# Altium PCB 388D_Control_v1_PCB1_temp.PcbDoc (part 2 of 4)
Units mil, origin at the board's own origin, x right, y up, seen from the top; angles counter-clockwise.
Board outline 4500 x 3200 mil, 6 copper layers (Top Layer, Singal Layer 2, Signal layer 3, Signal Layer 4, Signal Layer 5, Bottom Layer), stack 63.307 mil thick; 386 components, 377 nets, 1673 pads, 351 vias.
Unrouted connection lines stored in the file: 1151.
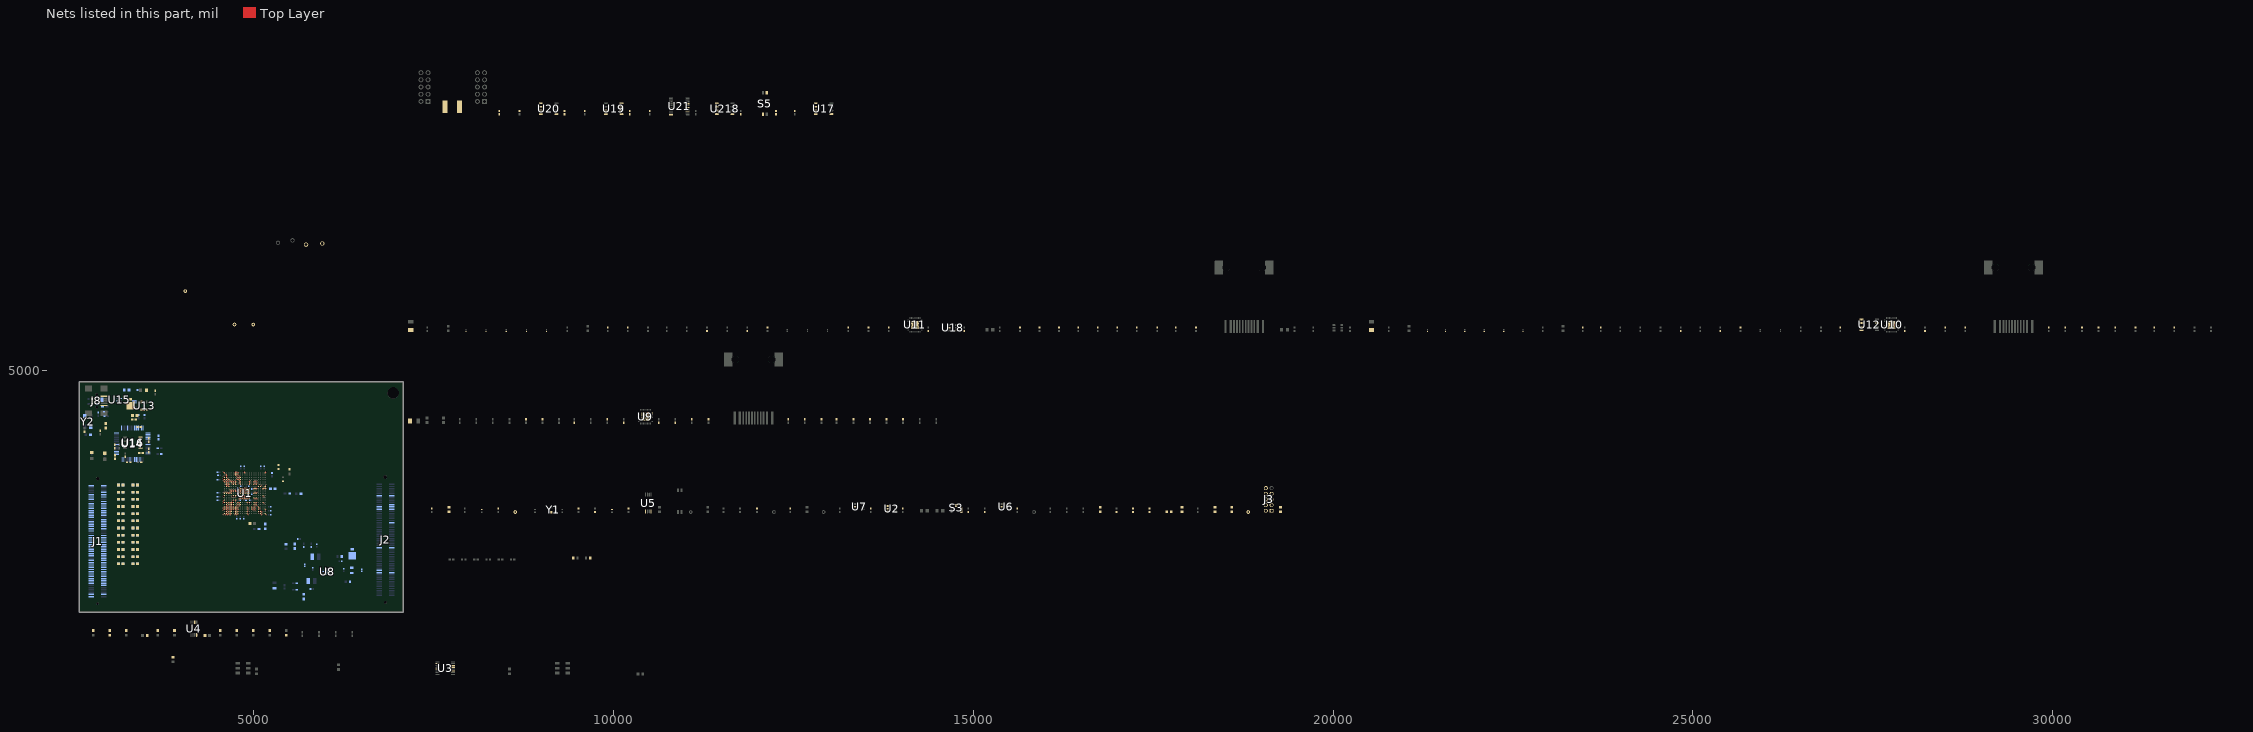
[diagram p2: the nets of this part, all layers, seen from the top]

## Part data
C1 C2 C3 C4 C5 C6 C7 C8 C9 C10 C11 C12 C13 C14 C15 C16 C17 C18 C19 C20 C21 C22 C23 C24: library part CMP-0006920-4, "CAP, CERM, 330 pF, 50 V, +/- 5%, C0G/NP0, 0603", Cap_Case=0603, Manufacturer=Kemet, Supplier Part Number 1=399-1068-1-ND, TempCo=C0G/NP0, Tolerance_%=5%, Value1=Unknown, Value2=50V, ValueDisplayed=330pF, AEC Category=Q200, AEC Qualified=?, Cap_F=330pF, ComponentLink1Description="Datasheet link", ComponentLink1URL=http://www.kemet.com/kemet/web/homepage/kechome.nsf/vapubfiles/F3102_Y5V.pdf/$file/F3102_Y5V.pdf, CompType=Capacitor, LatestRevisionDate=2017-03-09, MountType=SMT, PackageReference=0603, PartNumber=C0603C331J5GACTU, Polarized=N, Published=2008-06-19, Publisher="Texas Instruments", RoHS=Y, SizeArea_mm2=1.28, SizeAreaWB_mm2=4.68, SizeX_mm=1.6, SizeY_mm=0.8, SizeZ_mm=1, Supplier 1=Digi-Key, Supplier 2=Mouser, Supplier 3=Farnell, Supplier Part Number 2=80-C0603C331J5G, Supplier Part Number 3=1414634, TaMax_C=125¡ÆC, TaMin_C=-55¡ÆC, Technology=Ceramic, U/M=EA
C25 C30: library part CMP-0006862-5, "CAP, CERM, 0.1 uF, 10 V, +/- 10%, X7R, 0603", Cap_Case=0603, Manufacturer=Kemet, Supplier Part Number 1=399-1095-1-ND, TempCo=X7R, Tolerance_%=10%, Value1=Unknown, Value2=10V, ValueDisplayed=0.1uF, AEC Category=Q200, AEC Qualified=?, Cap_F=100nF, ComponentLink1Description="Datasheet link", ComponentLink1URL=http://www.kemet.com/kemet/web/homepage/kechome.nsf/vapubfiles/F3102_Y5V.pdf/$file/F3102_Y5V.pdf, CompType=Capacitor, LatestRevisionDate=2017-03-09, MountType=SMT, PackageReference=0603, PartNumber=C0603C104K8RACTU, Polarized=N, Published=2008-06-19, Publisher="Texas Instruments", RoHS=Y, SizeArea_mm2=1.28, SizeAreaWB_mm2=4.68, SizeX_mm=1.6, SizeY_mm=0.8, SizeZ_mm=1, Supplier 1=Digi-Key, Supplier 2=Mouser, Supplier 3=Farnell, Supplier Part Number 2=80-C0603C104K8R, Supplier Part Number 3=1640032, TaMax_C=125¡ÆC, TaMin_C=-55¡ÆC, Technology=Ceramic, U/M=EA
C26 C27 C28 C29 C35 C37: library part CMP-0007324-5, "CAP, CERM, 22 uF, 10 V, +/- 20%, X5R, 0603", Cap_Case=0603, Manufacturer=MuRata, Supplier Part Number 1=490-10476-1-ND, TempCo=X5R, Tolerance_%=20%, Value1=Unknown, Value2=10V, ValueDisplayed=22uF, AEC Category=Q200, AEC Qualified=?, Cap_F=22¥ìF, ComponentLink1Description="Datasheet link", ComponentLink1URL=http://psearch.murata.com/capacitor/product/GRM188R61A226ME15%23.pdf, CompType=Capacitor, LatestRevisionDate=2017-03-09, MountType=SMT, PackageReference=0603, PartNumber=GRM188R61A226ME15D, Polarized=N, Published=2008-06-19, Publisher="Texas Instruments", RoHS=Y, SizeArea_mm2=1.28, SizeAreaWB_mm2=4.68, SizeX_mm=1.6, SizeY_mm=0.8, SizeZ_mm=1, Supplier 1=Digi-Key, Supplier 2=Newark, Supplier 3=Mouser, Supplier Part Number 2=68X2786, Supplier Part Number 3=81-GRM188R61A226ME5D, TaMax_C=85¡ÆC, TaMin_C=-55¡ÆC, Technology=Ceramic, U/M=EA
C31: library part CMP-0006907-5, "CAP, CERM, 2.2 uF, 6.3 V, +/- 10%, X5R, 0603", Cap_Case=0603, Manufacturer=Kemet, Supplier Part Number 1=399-3362-1-ND, TempCo=X5R, Tolerance_%=10%, Value1=Unknown, Value2=6.3V, ValueDisplayed=2.2uF, AEC Category=Q200, AEC Qualified=?, Cap_F=2.2¥ìF, ComponentLink1Description="Datasheet link", ComponentLink1URL=http://www.kemet.com/kemet/web/homepage/kechome.nsf/vapubfiles/F3102_Y5V.pdf/$file/F3102_Y5V.pdf, CompType=Capacitor, LatestRevisionDate=2017-03-09, MountType=SMT, PackageReference=0603, PartNumber=C0603C225K9PACTU, Polarized=N, Published=2008-06-19, Publisher="Texas Instruments", RoHS=Y, SizeArea_mm2=1.28, SizeAreaWB_mm2=4.68, SizeX_mm=1.6, SizeY_mm=0.8, SizeZ_mm=1, Supplier 1=Digi-Key, Supplier 2=Mouser, Supplier 3=Farnell, Supplier Part Number 2=80-C0603C225K9P, Supplier Part Number 3=1288257, TaMax_C=85¡ÆC, TaMin_C=-55¡ÆC, Technology=Ceramic, U/M=EA
C32 C33 C34: library part CMP-0006871-4, "CAP, CERM, 1 uF, 6.3 V, +80/-20%, Y5V, 0603", Cap_Case=0603, Manufacturer=Kemet, Supplier Part Number 1=399-3217-1-ND, TempCo=Y5V, Tolerance_%=80%, Value1=Unknown, Value2=6.3V, ValueDisplayed=1uF, AEC Category=Q200, AEC Qualified=?, Cap_F=1¥ìF, ComponentLink1Description="Datasheet link", ComponentLink1URL=http://www.kemet.com/kemet/web/homepage/kechome.nsf/vapubfiles/F3102_Y5V.pdf/$file/F3102_Y5V.pdf, CompType=Capacitor, LatestRevisionDate=2017-03-09, MountType=SMT, PackageReference=0603, PartNumber=C0603C105Z9VACTU, Polarized=N, Published=2008-06-19, Publisher="Texas Instruments", RoHS=Y, SizeArea_mm2=1.28, SizeAreaWB_mm2=4.68, SizeX_mm=1.6, SizeY_mm=0.8, SizeZ_mm=1, Supplier 1=Digi-Key, Supplier 2=Mouser, Supplier 3=Farnell, Supplier Part Number 2=80-C0603C105Z9V, Supplier Part Number 3=1515067, TaMax_C=85¡ÆC, TaMin_C=-30¡ÆC, Technology=Ceramic, U/M=EA
C36: library part CMP-0006213-2, "CAP, CERM, 33 pF, 25 V, +/- 5%, C0G/NP0, 0402", Cap_Case=0402, Manufacturer="Wurth Elektronik", Supplier Part Number 1=710-885012005043, TempCo=C0G/NP0, Tolerance_%=5%, Value1=Unknown, Value2=25V, ValueDisplayed=33pF, AEC Category=Q200, AEC Grade=N/A, AEC Qualified=N, Cap_F=33pF, ComponentLink1Description="Datasheet link", ComponentLink1URL=http://katalog.we-online.de/pbs/datasheet/885012005043.pdf, CompType=Capacitor, LatestRevisionDate=2017-03-09, MountType=SMT, PackageReference=0402, PartNumber=885012005043, Polarized=N, Published=2008-06-19, Publisher="Texas Instruments", RoHS=Y, SizeArea_mm2=0.5, SizeAreaWB_mm2=3, SizeX_mm=1, SizeY_mm=0.5, SizeZ_mm=0.6, Supplier 1=Mouser, TaMax_C=125¡ÆC, TaMin_C=-55¡ÆC, Technology=Ceramic, U/M=EA, VDC_V=25V
C38 C40 C41 C44 C45 C46 C47 C48 C49 C50 C51 C52 C55 C56 C57 C58 C59 C60 C61 C62 C63 C64 C65 C66 C67 C68 C69 C70: library part CMP-001-00001-6, "Chip Capacitor, 0.1 uF, +/- 5%, 16 V, 0402 (1005 Metric)", Capacitor Type=Ceramic, Case/Package=0402, Max Operating Temperature=125¡ÆC, Min Operating Temperature=-55¡ÆC, Tolerance=5%, Voltage Rating=16V, Mounting Technology=SM, Pins=2, RoHS Compliant=True
C39: library part CMP-001-00081-4, "Chip Capacitor, 22¥ìF +/-40%, 16V, 0805, Thickness 1.45 mm", Case/Package=0805, Max Operating Temperature=85¡ÆC, Min Operating Temperature=-55¡ÆC, Tolerance=5%, Voltage Rating=16V, Mounting Technology=SMT, Pins=2
C42 C43 C53 C54: library part CMP-0006906-5, "CAP, CERM, 2.2 uF, 10 V, +/- 10%, X5R, 0603", Cap_Case=0603, Manufacturer=Kemet, Supplier Part Number 1=399-4911-1-ND, TempCo=X5R, Tolerance_%=10%, Value1=Unknown, Value2=10V, ValueDisplayed=2.2uF, AEC Category=Q200, AEC Qualified=?, Cap_F=2.2¥ìF, ComponentLink1Description="Datasheet link", ComponentLink1URL=http://www.kemet.com/kemet/web/homepage/kechome.nsf/vapubfiles/F3102_Y5V.pdf/$file/F3102_Y5V.pdf, CompType=Capacitor, LatestRevisionDate=2017-03-09, MountType=SMT, PackageReference=0603, PartNumber=C0603C225K8PACTU, Polarized=N, Published=2008-06-19, Publisher="Texas Instruments", RoHS=Y, SizeArea_mm2=1.28, SizeAreaWB_mm2=4.68, SizeX_mm=1.6, SizeY_mm=0.8, SizeZ_mm=1, Supplier 1=Digi-Key, Supplier 2=Mouser, Supplier 3=Farnell, Supplier Part Number 2=80-C0603C225K8P, Supplier Part Number 3=1108322, TaMax_C=85¡ÆC, TaMin_C=-55¡ÆC, Technology=Ceramic, U/M=EA
C71 C72: library part CMP-001-00075-4, "Chip Capacitor, 10¥ìF +/-20%, 10V, 0603, Thickness 1 mm", Case/Package=0603, Max Operating Temperature=85¡ÆC, Min Operating Temperature=-55¡ÆC, Tolerance=10%, Voltage Rating=10V, Mounting Technology=SMT, Pins=2
C73 C75 C77 C78 C108 C126 C132 C137 C138 C139 C140 C141 C142 C143 C145 C147 C151 C152 C153 C154 C155 C156 C157 C158 C159: library part CMP-0006343-2, "CAP, CERM, 0.1 uF, 10 V, +/- 10%, X7R, 0402", Cap_Case=0402, Manufacturer="Samsung Electro-Mechanics", TempCo=X7R, Tolerance_%=10%, Value1=Unknown, Value2=10V, ValueDisplayed=0.1uF, AEC Category=Q200, AEC Grade=N/A, AEC Qualified=N, Cap_F=100nF, ComponentLink1Description="Datasheet link", ComponentLink1URL=http://www.samsungsem.com/kr/front/downloadcms.do?path=/kr/support/product-search/mlcc/__icsFiles/afieldfile/2014/11/05&fileName=S_CL05B104KP5NNNC.pdf, CompType=Capacitor, LatestRevisionDate=2017-03-09, MountType=SMT, PackageReference=0402, PartNumber=CL05B104KP5NNNC, Polarized=N, Published=2008-06-19, Publisher="Texas Instruments", RoHS=Y, SizeArea_mm2=0.5, SizeAreaWB_mm2=3, SizeX_mm=1, SizeY_mm=0.5, SizeZ_mm=0.6, TaMax_C=125¡ÆC, TaMin_C=-55¡ÆC, Technology=Ceramic, U/M=EA, VDC_V=10V
C74 C76: library part CMP-0006236-2, "CAP, CERM, 0.01 uF, 50 V, +/- 5%, X7R, 0402", Cap_Case=0402, Manufacturer=Kemet, Supplier Part Number 1=399-7758-1-ND, TempCo=X7R, Tolerance_%=5%, Value1=Unknown, Value2=50V, ValueDisplayed=0.01uF, AEC Category=Q200, AEC Qualified=?, Cap_F=10nF, ComponentLink1Description="Datasheet link", ComponentLink1URL=http://www.kemet.com/Lists/ProductCatalog/Attachments/53/KEM_C1002_X7R_SMD.pdf, CompType=Capacitor, LatestRevisionDate=2017-03-09, MountType=SMT, PackageReference=0402, PartNumber=C0402C103J5RACTU, Polarized=N, Published=2008-06-19, Publisher="Texas Instruments", RoHS=Y, SizeArea_mm2=0.5, SizeAreaWB_mm2=3, SizeX_mm=1, SizeY_mm=0.5, SizeZ_mm=0.6, Supplier 1=Digi-Key, Supplier 2=Newark, Supplier 3=Mouser, Supplier Part Number 2=57J0044, Supplier Part Number 3=80-C0402C103J5R, TaMax_C=125¡ÆC, TaMin_C=-55¡ÆC, Technology=Ceramic, U/M=EA
C79 C86 C96 C103 C114 C121: library part CMP-0006340-2, "CAP, CERM, 10 uF, 6.3 V, +/- 20%, X5R, 0402", Cap_Case=0402, Manufacturer="Samsung Electro-Mechanics", TempCo=X5R, Tolerance_%=20%, Value1=Unknown, Value2=6.3V, ValueDisplayed=10uF, AEC Category=Q200, AEC Qualified=?, Cap_F=10¥ìF, ComponentLink1Description="Datasheet link", ComponentLink1URL=http://www.samsungsem.com/servlet/DownloadServlet?dir=partnumber&num=&fileName=CL05A106MQ5NUNC.pdf, CompType=Capacitor, LatestRevisionDate=2017-03-09, MountType=SMT, PackageReference=0402, PartNumber=CL05A106MQ5NUNC, Polarized=N, Published=2008-06-19, Publisher="Texas Instruments", RoHS=Y, SizeArea_mm2=0.5, SizeAreaWB_mm2=3, SizeX_mm=1, SizeY_mm=0.5, SizeZ_mm=0.6, TaMax_C=85¡ÆC, TaMin_C=-55¡ÆC, Technology=Ceramic, U/M=EA
C80 C85 C88 C89 C91 C94 C97 C102 C105 C106 C109 C112 C115 C120 C123 C124 C127 C130: library part CMP-0006347-2, "CAP, CERM, 1 uF, 16 V, +/- 10%, X5R, 0402", Cap_Case=0402, Manufacturer="Taiyo Yuden", Supplier Part Number 1=587-3709-2-ND, TempCo=X5R, Tolerance_%=10%, Value1=Unknown, Value2=16V, ValueDisplayed=1uF, AEC Category=Q200, AEC Qualified=?, Cap_F=1¥ìF, ComponentLink1Description="Datasheet link", ComponentLink1URL=http://www.yuden.co.jp/ut/product/category/capacitor/EMK105BJ105KVHF_SS.pdf, CompType=Capacitor, LatestRevisionDate=2017-03-09, MountType=SMT, PackageReference=0402, PartNumber=EMK105BJ105KVHF, Polarized=N, Published=2008-06-19, Publisher="Texas Instruments", RoHS=Y, SizeArea_mm2=0.5, SizeAreaWB_mm2=3, SizeX_mm=1, SizeY_mm=0.5, SizeZ_mm=0.6, Supplier 1=Digi-Key, Supplier 2=Newark, Supplier Part Number 2=68X1293, TaMax_C=85¡ÆC, TaMin_C=-55¡ÆC, Technology=Ceramic, U/M=EA
C81 C84 C87 C90 C92 C93 C98 C101 C104 C107 C110 C111 C116 C119 C122 C125 C128 C129: library part CMP-0064930-2, "CAP, CERM, 0.1 uF, 10 V,+/- 10%, X5R, 0402", Cap_Case=0402, Manufacturer="Taiyo Yuden", Supplier Part Number 1=587-1227-1-ND, TempCo=X5R, Tolerance_%=10%, Value1=Unknown, Value2=10V, ValueDisplayed=0.1uF, AEC Category=Q200, AEC Grade=N/A, AEC Qualified=N, Cap_F=100nF, ComponentLink1Description="Datasheet link", ComponentLink1URL=http://ds.yuden.co.jp/TYCOMPAS/ut/detail.do?productNo=LMK105BJ104KV-F&fileName=LMK105BJ104KV-F_SS&mode=specSheetDownload, CompType=Capacitor, LatestRevisionDate=2017-06-05, MountType=SMT, PackageReference=0402, PartNumber=LMK105BJ104KV-F, Polarized=N, Published=2008-06-19, Publisher="Texas Instruments", RoHS=Y, SizeArea_mm2=0.5, SizeAreaWB_mm2=3, SizeX_mm=1, SizeY_mm=0.5, SizeZ_mm=0.6, Supplier 1=Digi-Key, Supplier 2=Newark, Supplier 3=Mouser, Supplier Part Number 2=86H5618, Supplier Part Number 3=963-LMK105BJ104KV-F, TaMax_C=85¡ÆC, TaMin_C=-55¡ÆC, Technology=Ceramic, U/M=EA, VDC_V=10V
C82 C83 C99 C100 C117 C118: library part CMP-0006227-2, "CAP, CERM, 0.01 uF, 16 V, +/- 10%, X7R, 0402", Cap_Case=0402, Manufacturer="Wurth Elektronik", Supplier Part Number 1=710-885012205031, TempCo=X7R, Tolerance_%=10%, Value1=Unknown, Value2=16V, ValueDisplayed=0.01uF, AEC Category=Q200, AEC Grade=N/A, AEC Qualified=N, Cap_F=10nF, ComponentLink1Description="Datasheet link", ComponentLink1URL=http://katalog.we-online.de/pbs/datasheet/885012205031.pdf, CompType=Capacitor, LatestRevisionDate=2017-03-09, MountType=SMT, PackageReference=0402, PartNumber=885012205031, Polarized=N, Published=2008-06-19, Publisher="Texas Instruments", RoHS=Y, SizeArea_mm2=0.5, SizeAreaWB_mm2=3, SizeX_mm=1, SizeY_mm=0.5, SizeZ_mm=0.6, Supplier 1=Mouser, TaMax_C=125¡ÆC, TaMin_C=-55¡ÆC, Technology=Ceramic, U/M=EA
C95 C113 C131: library part CMP-0008501-2, "CAP, CERM, 4700 pF, 100 V, +/- 10%, X7R, 1206", Cap_Case=1206, Manufacturer=AVX, Supplier Part Number 1=478-1521-1-ND, TempCo=X7R, Tolerance_%=10%, Value1="0.178 ohm", Value2=100V, ValueDisplayed=4700pF, AEC Category=Q200, AEC Grade=N/A, AEC Qualified=N, Cap_F=4.7nF, ComponentLink1Description="Datasheet link", ComponentLink1URL=http://datasheets.avx.com/X7RDielectric.pdf, CompType=Capacitor, ESR_ohm=1.78d, LatestRevisionDate=2017-03-09, MountType=SMT, PackageReference=1206, PartNumber=12061C472KAT2A, Polarized=N, Published=2008-06-19, Publisher="Texas Instruments", RoHS=Y, SizeArea_mm2=5.12, SizeAreaWB_mm2=10.92, SizeX_mm=3.2, SizeY_mm=1.6, SizeZ_mm=1.35, Supplier 1=Digi-Key, Supplier 2=Newark, Supplier 3=Mouser, Supplier Part Number 2=96M1479, Supplier Part Number 3=581-12061C472K, TaMax_C=125¡ÆC, TaMin_C=-55¡ÆC, Technology=Ceramic, U/M=EA
C133 C134 C136 C144 C146: library part CMP-0006950-5, "CAP, CERM, 4.7 uF, 6.3 V, +/- 10%, X5R, 0603", Cap_Case=0603, Manufacturer=Kemet, Supplier Part Number 1=399-3482-1-ND, TempCo=X5R, Tolerance_%=10%, Value1="0.006 ohm", Value2=6.3V, ValueDisplayed=4.7uF, AEC Category=Q200, AEC Qualified=?, Cap_F=4.7¥ìF, ComponentLink1Description="Datasheet link", ComponentLink1URL=http://www.kemet.com/kemet/web/homepage/kechome.nsf/vapubfiles/F3102_Y5V.pdf/$file/F3102_Y5V.pdf, CompType=Capacitor, ESR_ohm=6m, IRMS_A=7.24A, LatestRevisionDate=2017-03-09, MountType=SMT, PackageReference=0603, PartNumber=C0603C475K9PACTU, Polarized=N, Published=2008-06-19, Publisher="Texas Instruments", RoHS=Y, SizeArea_mm2=1.28, SizeAreaWB_mm2=4.68, SizeX_mm=1.6, SizeY_mm=0.8, SizeZ_mm=1, Supplier 1=Digi-Key, Supplier 2=Mouser, Supplier 3=Farnell, Supplier Part Number 2=80-C0603C475K9P, Supplier Part Number 3=9227784, TaMax_C=85¡ÆC, TaMin_C=-55¡ÆC, Technology=Ceramic, U/M=EA
C135: library part CMP-0006203-2, "CAP, CERM, 0.01 uF, 10 V, +/- 10%, X7R, 0402", Cap_Case=0402, Manufacturer=AVX, Supplier Part Number 1=478-7890-1-ND, TempCo=X7R, Tolerance_%=10%, Value1=Unknown, Value2=10V, ValueDisplayed=0.01uF, AEC Category=Q200, AEC Grade=N/A, AEC Qualified=N, Cap_F=10nF, ComponentLink1Description="Datasheet link", ComponentLink1URL=http://datasheets.avx.com/X7RDielectric.pdf, CompType=Capacitor, LatestRevisionDate=2017-03-09, MountType=SMT, PackageReference=0402, PartNumber=0402ZC103KAT2A, Polarized=N, Published=2008-06-19, Publisher="Texas Instruments", RoHS=Y, SizeArea_mm2=0.5, SizeAreaWB_mm2=3, SizeX_mm=1, SizeY_mm=0.5, SizeZ_mm=0.6, Supplier 1=Digi-Key, Supplier 2=Newark, Supplier 3=Mouser, Supplier Part Number 2=94W2829, Supplier Part Number 3=581-0402ZC103KAT2A, TaMax_C=125¡ÆC, TaMin_C=-55¡ÆC, Technology=Ceramic, U/M=EA
C148: library part CMP-0006319-2, "CAP, CERM, 3300 pF, 50 V, +/- 10%, X7R, AEC-Q200 Grade 1, 0402", Cap_Case=0402, Manufacturer=TDK, Supplier Part Number 1=445-6891-1-ND, TempCo=X7R, Tolerance_%=10%, Value1="0.785178 ohm", Value2=50V, ValueDisplayed=3300pF, AEC Category=Q200, AEC Grade=1, AEC Qualified=Y, Cap_F=3.3nF, ComponentLink1Description="Datasheet link", ComponentLink1URL=https://product.tdk.com/en/search/capacitor/ceramic/mlcc/info?part_no=CGA2B2X7R1H332K050BA, CompType=Capacitor, ESR_ohm=7.85178d, IRMS_A=2.72902dA, LatestRevisionDate=2017-03-09, MountType=SMT, PackageReference=0402, PartNumber=CGA2B2X7R1H332K050BA, Polarized=N, Published=2008-06-19, Publisher="Texas Instruments", RoHS=Y, SizeArea_mm2=0.5, SizeAreaWB_mm2=3, SizeX_mm=1, SizeY_mm=0.5, SizeZ_mm=0.6, Supplier 1=Digi-Key, Supplier 2=Mouser, Supplier Part Number 2=810-CGA2B2X7R1H332K050BA, TaMax_C=125¡ÆC, TaMin_C=-55¡ÆC, Technology=Ceramic, U/M=EA
C149 C150: library part CMP-0750098-1, "CAP, CERM, 27 pF, 50 V,+/- 5%, C0G/NP0, 0402", Cap_Case=0402, Manufacturer=Kemet, TempCo=C0G/NP0, Tolerance_%=5%, Value2=50V, ValueDisplayed=27pF, AEC Category=Q200, AEC Grade=N/A, AEC Qualified=N, Cap_F=27pF, ComponentLink1Description="Datasheet link", ComponentLink1URL=https://content.kemet.com/datasheets/KEM_C1003_C0G_SMD.pdf, CompType=Capacitor, Green_EU RoHS=Passed, Green_EU RoHS-2=Passed, Green_Lifecycle=Active, Green_REACh=Passed, MountType=SMT, PackageReference=0402, PartNumber=C0402C270J5GACTU, Polarized=N, RoHS=Y, SizeArea_mm2=0.5, SizeAreaWB_mm2=3, SizeX_mm=1, SizeY_mm=0.5, SizeZ_mm=0.6, TaMax_C=125¡ÆC, TaMin_C=-55¡ÆC, Technology=Ceramic, U/M=EA
C160: library part CMP-0082066-1, "CAP, CERM, 10 pF, 3000 V,+/- 5%, C0G/NP0, AEC-Q200 Grade 1, 1812", Cap_Case=1812, Manufacturer=Kemet, Supplier Part Number 1=399-7113-1-ND, TempCo=C0G/NP0, Tolerance_%=5%, Value2=3000V, ValueDisplayed=10pF, AEC Category=Q200, AEC Grade=1, AEC Qualified=Y, Cap_F=10pF, ComponentLink1Description="Datasheet link", ComponentLink1URL=https://search.kemet.com/component-edge/download/datasheet/C1812C100JHGACTU.pdf, CompType=Capacitor, MountType=SMT, PackageReference=1812, PartNumber=C1812C100JHGACTU, Polarized=N, RoHS=Y, SizeArea_mm2=14.4, SizeAreaWB_mm2=23.1, SizeX_mm=4.5, SizeY_mm=3.2, SizeZ_mm=1.8, Supplier 1=Digi-Key, Supplier 2=Mouser, Supplier Part Number 2=80-C1812C100JHG, TaMax_C=125¡ÆC, TaMin_C=-55¡ÆC, Technology=Ceramic, U/M=EA
D1: "Diode, Schottky, 10 V, 1 A, AEC-Q101, POWERMITE", Case/Package=POWERMITE, Manufacturer="ON Semiconductor", PartNumber=MBRM110ET1G, Value1=1A, Value2=0.53V, AEC Category=Q101, AEC Qualified=Y, Available Preview Images=2D, ComponentLink1Description="Datasheet link", ComponentLink1URL=http://www.onsemi.com/pub_link/Collateral/MBRM110E-D.PDF, CompType=Diode, Design Item ID=CMP-0028747-2, Green_EU RoHS=Incomplete, Green_EU RoHS-2=Incomplete, Green_Lifecycle="Not Set", Green_REACh=Incomplete, Io_A=1A, MountType=SMT, RoHS=Y, SizeArea_mm2=7.995, SizeAreaWB_mm2=14.945, SizeX_mm=3.9, SizeY_mm=2.05, SizeZ_mm=1.15, Source=MCU063B.SCHLIB, TJmax_C=150¡ÆC, Type=Schottky, Vf_V=530mV, Vr_V=10V
D2: library part CMP-004-00069-1, "SURFACE MOUNT SILICON LOW VF SCHOTTKY DIODE 0.5 AMP", Arrow Part Number="CFSH05-20L TR PBFREE", Manufacturer_Name="Central Semiconductor", Mouser Part Number=610-CFSH05-20LTR, Arrow Price/Stock=https://www.arrow.com/en/products/cfsh05-20ltrpbfree/central-semiconductor?region=nac, Datasheet Link=https://my.centralsemi.com/get_document.php?cmp=1&mergetype=pd&mergepath=pd&pdf_id=CFSH05-20L.PDF, Design Item ID=CFSH05-20L_TR_PBFREE, Height=0.4mm, Manufacturer_Part_Number="CFSH05-20L TR PBFREE", Mouser Price/Stock=https://www.mouser.co.uk/ProductDetail/Central-Semiconductor/CFSH05-20L-TR-PBFREE?qs=u16ybLDytRbLc8US0gUlgw%3D%3D, Source=SamacSys.SchLib
D3 D4 D5: library part CMP-0002951-3, "LED, Red, SMD", Color=Red, Manufacturer="Wurth Elektronik", Power_TotalModule=72mW, Value1=0.072W, Value2=1.9V, Angle=140, ComponentLink1Description="Datasheet link", ComponentLink1URL=http://katalog.we-online.de/led/datasheet/150080SS75000.pdf, CompType=LED, Io_A=30mA, Ir_A=25¥ìA, MountType=SMT, PackageReference=LED_0805, PartNumber=150080SS75000, RoHS=Y, TJmax_C=85¡ÆC, Type=AlInGaP, Vf_V=1.9V, Vr_V=5V
D6 D8: library part CMP-0002960-2, "LED, Bright Green, SMD", Color="Bright Green", Manufacturer="Wurth Elektronik", Power_TotalModule=72mW, Supplier Part Number 1=732-4986-1-ND, Value1=0.072W, Value2=2V, Angle=140, ComponentLink1Description="Datasheet link", ComponentLink1URL=http://katalog.we-online.de/led/datasheet/150080VS75000.pdf, CompType=LED, Io_A=20mA, LatestRevisionDate=2017-03-09, MountType=SMT, PackageReference=LED_0805, PartNumber=150080VS75000, Published=2008-07-11, Publisher="Texas Instruments", RoHS=Y, Supplier 1=Digi-Key, Supplier 2=Newark, Supplier 3=Mouser, Supplier Part Number 2=95W3803, Supplier Part Number 3=710-150080VS75000, TJmax_C=85¡ÆC, Type=AlInGaP, U/M=EA, Vf_V=2V, Vr_V=5V
D7: library part CMP-0028747-2, "Diode, Schottky, 10 V, 1 A, AEC-Q101, POWERMITE", Manufacturer="ON Semiconductor", Value1=1A, Value2=0.53V, AEC Category=Q101, AEC Qualified=Y, ComponentLink1Description="Datasheet link", ComponentLink1URL=http://www.onsemi.com/pub_link/Collateral/MBRM110E-D.PDF, CompType=Diode, Green_EU RoHS=Incomplete, Green_EU RoHS-2=Incomplete, Green_Lifecycle="Not Set", Green_REACh=Incomplete, Io_A=1A, MountType=SMT, PackageReference=POWERMITE, PartNumber=MBRM110ET1G, RoHS=Y, SizeArea_mm2=7.995, SizeAreaWB_mm2=14.945, SizeX_mm=3.9, SizeY_mm=2.05, SizeZ_mm=1.15, TJmax_C=150¡ÆC, Type=Schottky, Vf_V=530mV, Vr_V=10V
D9 D10: library part CMP-0002959-3, "LED, Blue, SMD", Color=Blue, Manufacturer="Wurth Elektronik", Power_TotalModule=105mW, Value1=0.105W, Value2=3.2V, Angle=140, ComponentLink1Description="Datasheet link", ComponentLink1URL=http://katalog.we-online.de/led/datasheet/150080BS75000.pdf, CompType=LED, Io_A=20mA, MountType=SMT, PackageReference=LED_0805, PartNumber=150080BS75000, RoHS=Y, TJmax_C=85¡ÆC, Type=InGaN, Vf_V=3.2V, Vr_V=5V
J1 J2: library part CMP-002-00178-1, "Socket(male) 100 Positions, Dual Row, Vertical Receptacle. BergStak Lite 0.80mm, Board-to-Board Connector,", Case/Package=None, Check_prices=https://www.snapeda.com/parts/10144517-101802LF/Amphenol/view-part/?ref=eda, Design Item ID=10144517-101802LF, MF="AMPHENOL ICC / FCI", MP=10144517-101802LF, SnapEDA_Link=https://www.snapeda.com/parts/10144517-101802LF/Amphenol/view-part/?ref=snap, Source=SamacSys.SchLib
J3: library part CMP-002-00180-1, "Board-To-Board Connector, TMM Series, 10 Contacts, Header, 2 mm, Through Hole, 2 Rows", Case/Package=HDR10, Current_A=3.2A, Manufacturer=Samtec, PartNumber=TMM-105-01-T-D, Voltage_V=281V, altium.hash=C950CEBA21A329A8019504D2F69C58E3, Available Preview Images=2D, ComponentLink1Description=Datasheet, ComponentLink1URL=http://suddendocs.samtec.com/catalog_english/tmm_th.pdf, ContactFinish=Tin,Nickel, Design Item ID=CMP-0086568-1, PartId=1, PinCount=10, RoHS=TRUE, Row_Count=2, Source=MCU063B.SCHLIB, Symbol Name=SYM-TMM-105-01-T-D
J5 J6 J7: library part CMP-0086350-1, "Connector, RJ45, 1x1, Gold, R/A, SMT", Manufacturer="Wurth Elektronik", ComponentLink1Description="Datasheet URL", ComponentLink1URL=https://sps16.itg.ti.com/sites/KMS/crossdivteams/altium/docs/ComponentDatasheets/7498010210A.pdf, CompType=RJ45, ContactFinish=Gold, Gender=Female, MountType=SMT, Orientation=R/A, PackageReference="Connector, RJ45, 1x1, Gold, R/A, SMT", PartNumber=7498010210A, PinCount=12, RoHS=Y, Row_Count=1
J8: library part CMP-0054809-1, "Connector, Receptacle, USB Mini B 2.0, SMT", Color=Black, Current_A=1A, Manufacturer="Wurth Elektronik", Supplier Part Number 1=732-2109-1-ND, Voltage_V=30V, Cert_CULUS=Y, Cert_UL=Y, CNHeader=FALSE, ComponentLink1Description="Datasheet URL", ComponentLink1URL=http://katalog.we-online.de/em/datasheet/65100516121.pdf, CompType=USB, ContactFinish=Gold, CT=TRUE, Gender=Female, Green_EU RoHS=Passed, Green_EU RoHS-2=Incomplete, Green_Lifecycle=Active, Green_REACh=Passed, LatestRevisionDate=26/05/2017, MountType=SMT, Orientation=R/A, PackageReference="Connector, Receptacle, USB Mini B 2.0, 5 Position, SMT", PartNumber=65100516121, PinCount=5, Pitch_mm=0.8, Publisher="Texas Instruments", RoHS=Y, Row_Count=1, Supplier 1=Digi-Key, Supplier 2=Newark, Supplier 3=Mouser, Supplier Part Number 2=19P1304, Supplier Part Number 3=710-65100516121
J9 J10: library part CMP-002-00158-1, "10 Positions Header Connector 0.100\" (2.54mm) Through Hole Gold", Manufacturer_Name="On Shore Technology Inc.", Arrow Part Number=302-S101, Arrow Price/Stock=https://www.arrow.com/en/products/302-s101/on-shore-technology?utm_currency=USD&region=nac, Datasheet Link=https://www.digikey.com/product-detail/en/on-shore-technology-inc/302-S101/ED1543-ND/2178422, Design Item ID=302-S101, Height=9.05mm, Manufacturer_Part_Number=302-S101, Source=SamacSys.SchLib
L1 L2: library part CMP-006-00009-6, "Chip Inductor, 2.2 uH, +/- 20%, -55 to 125 degC, 1008 (2520 Metric), RoHS, Tape and Reel", Case/Package=1008, Current Rating=1.3A, Manufacturer=Murata, Max Operating Temperature=125¡ÆC, Min Operating Temperature=-55¡ÆC, Package Description="2-Pin Surface Mounted Device, Body 2.5 x 2 mm", Package Quantity=3000, Self Resonant Frequency=40MHz, Tolerance=20%, Core Material=Ferrite, Datasheet URL=http://psearch.en.murata.com/inductor/product/LQM2HPN2R2MG0%23.pdf, Datasheet Version=Aug-16, Mounting Technology=SM, Package Reference=1008, Packaging=TapeandReel, RoHS Compliant=True, Shielding=Shielded
L3 L4 L5: library part CMP-006-00004-3, "Chip Ferrite Bead for General Use, 120 Ohm, 500 mA, -55 to 125 degC, 0603 (1608 Metric), RoHS, Tape and Reel", Case/Package=0603, Current Rating=500mA, Manufacturer=Murata, Max Operating Temperature=125¡ÆC, Min Operating Temperature=-55¡ÆC, Package Quantity=4000, Package Reference=BLM18_H950-2, Resistance=200mohm, Tolerance=25%, Core Material=Ferrite, Datasheet URL=https://statics3.seeedstudio.com/images/opl/datasheet/303010016.pdf, Datasheet Version=Jun-12, Impedance=120Ohm, Max Current Rating=500mA, Packaging=TapeandReel, RoHS Compliant=True
L6 L7: library part CMP-0003398-1, "Ferrite Bead, 600 ohm @ 100 MHz, 0.5 A, 0805", Manufacturer="Laird-Signal Integrity Products", Supplier Part Number 1=240-2399-1-ND, Value1="0.3 ohm", Value2=0.5A, ValueDisplayed="600 ohm", ComponentLink1Description="Datasheet link", ComponentLink1URL=http://www.lairdtech.com/WorkArea/linkit.aspx?linkIdentifier=id&ItemID=4884, CompType="Ferrite Bead", DCR_ohm=3d, Imax_A=5dA, LatestRevisionDate=2017-03-09, MountType=SMT, PackageReference=0805, PartNumber=HZ0805E601R-10, Published=2014-04-30, Publisher="Texas Instruments", RoHS=Y, SizeArea_mm2=2.5, SizeAreaWB_mm2=6.75, SizeX_mm=2, SizeY_mm=1.25, SizeZ_mm=1.45, Supplier 1=Digi-Key, Supplier 2=Newark, Supplier 3=Mouser, Supplier Part Number 2=66W8909, Supplier Part Number 3=875-HZ0805E601R-10, ZTyp@100MHz_Ohm=600
LED1: library part CMP-007-00038-1, "WL-SMCW SMT Mono-Color Chip LED Waterclear 0805", Manufacturer_Name="Wurth Elektronik", Mouser Part Number=710-150080VS75000, Datasheet Link=https://www.we-online.com/components/products/download/Download_3D_150080VS75000+%28rev1%29.pdf, Design Item ID=150080VS75000, Height=0.7mm, Manufacturer_Part_Number=150080VS75000, Mouser Price/Stock=https://www.mouser.co.uk/ProductDetail/Wurth-Elektronik/150080VS75000?qs=LlUlMxKIyB0tGHJmO6%252B0ug%3D%3D, Source=SamacSys.SchLib
R1 R2: library part CMP-009-00031-5, "Chip Resistor, 4.7 KOhm, +/- 1%, 0.1 W, -55 to 155 degC, 0603 (1608 Metric)", Case/Package=0603, Max Operating Temperature=155¡ÆC, Min Operating Temperature=-55¡ÆC, Power=100mW, Tolerance=1%, Mounting Technology=SM, Pins=2, RoHS Compliant=True
R3 R4 R5 R6 R7 R8 R59: library part CMP-0026916-3, "RES, 39, 5%, 0.063 W, AEC-Q200 Grade 0, 0402", Manufacturer=Vishay-Dale, Power_W=63mW, Supplier Part Number 1=541-39JCT-ND, TempCo="200 ppm/C", Tolerance_%=5%, Value2=0.063W, Value_Code=39R0, ValueDisplayed=39, AEC Category=Q200, AEC Grade=0, AEC Qualified=Y, ComponentLink1Description="Datasheet link", ComponentLink1URL=http://www.vishay.com/docs/20035/dcrcwe3.pdf, CompType=Resistor, EIA_Code=E24, MountType=SMT, PackageReference=0402, PartNumber=CRCW040239R0JNED, Res_ohm=39, RoHS=E, SizeArea_mm2=0.5, SizeX_mm=1, SizeY_mm=0.5, SizeZ_mm=0.6, Supplier 1=Digi-Key, Supplier 2=Newark, Supplier 3=Mouser, Supplier Part Number 2=89M6649, Supplier Part Number 3=71-CRCW0402J-39-E3, Technology="Thick Film", Value1=5%, VDC_V=50V
R9 R10 R11 R12 R13 R14 R15 R16 R17 R18 R19 R20 R21 R22 R23 R24 R25 R26 R27 R28 R29 R30 R31 R32 R33 R34 R35 R36 R41 R42 R56 R57 R58 R60 R61 R65 R72 R73 R76 R85: library part CMP-0025697-4, "RES, 0, 5%, 0.1 W, AEC-Q200 Grade 0, 0603", Manufacturer=Vishay-Dale, Power_W=100mW, Supplier Part Number 1=541-0.0GCT-ND, TempCo="200 ppm/C", Tolerance_%=5%, Value2=0.1W, Value_Code=0000, ValueDisplayed=0, AEC Category=Q200, AEC Grade=0, AEC Qualified=Y, ComponentLink1Description="Datasheet link", ComponentLink1URL=http://www.vishay.com/docs/20035/dcrcwe3.pdf, CompType=Resistor, EIA_Code=E24, MountType=SMT, PackageReference=0603, PartNumber=CRCW06030000Z0EA, Res_ohm=0, RoHS=E, SizeArea_mm2=1.28, SizeX_mm=1.6, SizeY_mm=0.8, SizeZ_mm=1, Supplier 1=Digi-Key, Supplier 2=Newark, Supplier 3=Mouser, Supplier Part Number 2=52K8014, Supplier Part Number 3=71-CRCW0603-0-E3, Technology="Thick Film", Value1=5%, VDC_V=75V
R37 R38 R39 R40: library part CMP-0078660-1, "RES, 0.1, 1%, 0.25 W, 0402", Manufacturer=Panasonic, Power_W=250mW, Supplier Part Number 1=P17368CT-ND, TempCo="300 ppm/C", Tolerance_%=1%, Value2=0.25W, Value_Code=R100, ValueDisplayed=0.1, AEC Category=Q200, AEC Grade=N/A, AEC Qualified=N, ComponentLink1Description="Datasheet link", ComponentLink1URL=https://industrial.panasonic.com/cdbs/www-data/pdf/RDN0000/AOA0000C313.pdf, CompType=Resistor, EIA_Code=E96, MountType=SMT, PackageReference=0402, PartNumber=ERJ2BWFR100X, Res_ohm=1d, RoHS=Y, SizeArea_mm2=0.5, SizeX_mm=1, SizeY_mm=0.5, SizeZ_mm=0.6, Supplier 1=Digi-Key, Supplier 2=Mouser, Supplier Part Number 2=667-ERJ-2BWFR100X, Technology="Thick Film", Value1=1%
R43: library part CMP-0022895-5, "RES, 1.00 k, 1%, 0.1 W, 0603", Manufacturer=Yageo, Power_W=100mW, Supplier Part Number 1=311-1.00KHRCT-ND, TempCo="100 ppm/C", Tolerance_%=1%, Value2=0.1W, Value_Code=1k00, ValueDisplayed=1.00k, AEC Category=Q200, AEC Grade=N/A, AEC Qualified=N, ComponentLink1Description="Datasheet link", ComponentLink1URL=http://www.yageo.com/pdf/Pu-RC0603_51_PbFree_L_2.pdf, CompType=Resistor, EIA_Code=E96, MountType=SMT, PackageReference=0603, PartNumber=RC0603FR-071KL, Res_ohm=1k, RoHS=Y, SizeArea_mm2=1.28, SizeAreaWB_mm2=4.68, SizeX_mm=1.6, SizeY_mm=0.8, SizeZ_mm=1, Supplier 1=Digi-Key, Supplier 2=Mouser, Supplier 3=Farnell, Supplier Part Number 2=603-RC0603FR-071KL, Supplier Part Number 3=9238484, Technology="Thick Film", Value1=1%, VDC_V=75V
R44: library part CMP-009-00005-5, "Chip Resistor, 0 Ohm, 0.1 W, -55 to 155 degC, 0402 (1005 Metric)", Case/Package=0402, Max Operating Temperature=155¡ÆC, Min Operating Temperature=-55¡ÆC, Power=100mW, Tolerance=5%, Voltage Rating=50V, Mounting Technology=SM, Pins=2, RoHS Compliant=True
R45: library part CMP-009-00081-2, "22K 0.063W 1% 0402 (1005 Metric)  SMD", Case/Package=0402, Power=63mW, Tolerance=1%, Mounting Technology=SMT, Pins=2
R46: library part CMP-009-00006-5, "Chip Resistor, 0 Ohm, 0.1 W, -55 to 155 degC, 0603 (1608 Metric)", Case/Package=0603, Max Operating Temperature=155¡ÆC, Min Operating Temperature=-55¡ÆC, Power=100mW, Tolerance=5%, Voltage Rating=50V, Mounting Technology=SM, Pins=2, RoHS Compliant=True
R47 R66 R67 R122 R142: library part CMP-0026962-3, "RES, 680, 5%, 0.063 W, AEC-Q200 Grade 0, 0402", Manufacturer=Vishay-Dale, Power_W=63mW, Supplier Part Number 1=541-680JCT-ND, TempCo="200 ppm/C", Tolerance_%=5%, Value2=0.063W, Value_Code=680R, ValueDisplayed=680, AEC Category=Q200, AEC Grade=0, AEC Qualified=Y, ComponentLink1Description="Datasheet link", ComponentLink1URL=http://www.vishay.com/docs/20035/dcrcwe3.pdf, CompType=Resistor, EIA_Code=E24, MountType=SMT, PackageReference=0402, PartNumber=CRCW0402680RJNED, Res_ohm=680, RoHS=E, SizeArea_mm2=0.5, SizeX_mm=1, SizeY_mm=0.5, SizeZ_mm=0.6, Supplier 1=Digi-Key, Supplier 2=Newark, Supplier 3=Mouser, Supplier Part Number 2=59M6744, Supplier Part Number 3=71-CRCW0402J-680-E3, Technology="Thick Film", Value1=5%, VDC_V=50V
R48: library part CMP-0026300-2, "RES, 340 k, 1%, 0.063 W, AEC-Q200 Grade 0, 0402", Manufacturer=Vishay-Dale, Power_W=63mW, Supplier Part Number 1=541-340KLCT-ND, TempCo="100 ppm/C", Tolerance_%=1%, Value2=0.063W, Value_Code=340k, AEC Category=Q200, AEC Grade=0, AEC Qualified=Y, ComponentLink1Description="Datasheet link", ComponentLink1URL=http://www.vishay.com/docs/20035/dcrcwe3.pdf, CompType=Resistor, EIA_Code=E96, MountType=SMT, PackageReference=0402, PartNumber=CRCW0402340KFKED, Res_ohm=340k, RoHS=E, SizeArea_mm2=0.5, SizeX_mm=1, SizeY_mm=0.5, SizeZ_mm=0.6, Supplier 1=Digi-Key, Supplier 2=Newark, Supplier 3=Mouser, Supplier Part Number 2=52K6992, Supplier Part Number 3=71-CRCW0402-340K-E3, Technology="Thick Film", Value1=1%, ValueDisplayed=340k, VDC_V=50V
R49: library part CMP-0026676-1, "RES, 2.00 k, 1%, 0.1 W, AEC-Q200 Grade 0, 0402", Manufacturer=Panasonic, Power_W=100mW, Supplier Part Number 1=P2.00KLCT-ND, TempCo="100 ppm/C", Tolerance_%=1%, Value2=0.1W, Value_Code=2k00, ValueDisplayed=2.00k, AEC Category=Q200, AEC Grade=0, AEC Qualified=Y, ComponentLink1Description="Datasheet link", ComponentLink1URL=http://industrial.panasonic.com/cdbs/www-data/pdf/RDA0000/AOA0000C86.pdf, CompType=Resistor, EIA_Code=E96, LatestRevisionDate=2017-03-09, MountType=SMT, PackageReference=0402, PartNumber=ERJ-2RKF2001X, Published=2008-06-26, Publisher="Texas Instruments", Res_ohm=2k, RoHS=Y, SizeArea_mm2=0.5, SizeX_mm=1, SizeY_mm=0.5, SizeZ_mm=0.6, Supplier 1=Digi-Key, Supplier 2=Newark, Supplier 3=Mouser, Supplier Part Number 2=73T6486, Supplier Part Number 3=667-ERJ-2RKF2001X, Technology="Thick Film", U/M=EA, Value1=1%, VDC_V=50V
R50: library part CMP-0026160-2, "RES, 205 k, 1%, 0.063 W, AEC-Q200 Grade 0, 0402", Manufacturer=Vishay-Dale, Power_W=63mW, Supplier Part Number 1=541-205KLCT-ND, TempCo="100 ppm/C", Tolerance_%=1%, Value2=0.063W, Value_Code=205k, AEC Category=Q200, AEC Grade=0, AEC Qualified=Y, ComponentLink1Description="Datasheet link", ComponentLink1URL=http://www.vishay.com/docs/20035/dcrcwe3.pdf, CompType=Resistor, EIA_Code=E96, MountType=SMT, PackageReference=0402, PartNumber=CRCW0402205KFKED, Res_ohm=205k, RoHS=E, SizeArea_mm2=0.5, SizeX_mm=1, SizeY_mm=0.5, SizeZ_mm=0.6, Supplier 1=Digi-Key, Supplier 2=Newark, Supplier 3=Mouser, Supplier Part Number 2=52K6827, Supplier Part Number 3=71-CRCW0402-205K-E3, Technology="Thick Film", Value1=1%, ValueDisplayed=205k, VDC_V=50V
R51: library part CMP-009-00066-2, "10K 0.063W 1% 0402 (1005 Metric)  SMD", Case/Package=0402, Power=63mW, Tolerance=1%, Mounting Technology=SMT, Pins=2
R52: library part CMP-009-00023-5, "Chip Resistor, 100 KOhm, +/- 1%, 0.1 W, -55 to 155 degC, 0603 (1608 Metric)", Case/Package=0603, Max Operating Temperature=155¡ÆC, Min Operating Temperature=-55¡ÆC, Power=100mW, Tolerance=1%, Voltage Rating=50V, Mounting Technology=SM, Pins=2, RoHS Compliant=True
R53: library part CMP-009-00163-3, "Chip Resistor, 200 kOhms, +/-1 %, 63 mW, -55 to 155 degC, 0402", Case/Package=0402, Max Operating Temperature=155¡ÆC, Min Operating Temperature=-55¡ÆC, Power=63mW, Tolerance=1%, Pins=2
R54: library part CMP-0025557-3, "RES, 75.0 k, 0.5%, 0.1 W, 0603", Manufacturer="Yageo America", Power_W=100mW, TempCo="50 ppm/C", Tolerance_%=0.5%, Value2=0.1W, Value_Code=75k0, ValueDisplayed=75.0k, AEC Category=Q200, AEC Qualified=?, ComponentLink1Description="Datasheet link", ComponentLink1URL=http://www.yageo.com/pdf/PYu-RT_1-to-0.05_RoHS_L_3.pdf, CompType=Resistor, EIA_Code=E192, LatestRevisionDate=2017-03-09, MountType=SMT, PackageReference=0603, PartNumber=RT0603DRE0775KL, Published=2008-06-26, Publisher="Texas Instruments", Res_ohm=75k, RoHS=Y, SizeArea_mm2=1.28, SizeX_mm=1.6, SizeY_mm=0.8, SizeZ_mm=1, Technology="Thin Film", U/M=EA, Value1=0.5%, VDC_V=75V
R55: library part CMP-0026950-3, "RES, 56, 5%, 0.063 W, AEC-Q200 Grade 0, 0402", Manufacturer=Vishay-Dale, Power_W=63mW, Supplier Part Number 1=541-56JCT-ND, TempCo="200 ppm/C", Tolerance_%=5%, Value2=0.063W, Value_Code=56R0, ValueDisplayed=56, AEC Category=Q200, AEC Grade=0, AEC Qualified=Y, ComponentLink1Description="Datasheet link", ComponentLink1URL=http://www.vishay.com/docs/20035/dcrcwe3.pdf, CompType=Resistor, EIA_Code=E24, MountType=SMT, PackageReference=0402, PartNumber=CRCW040256R0JNED, Res_ohm=56, RoHS=E, SizeArea_mm2=0.5, SizeX_mm=1, SizeY_mm=0.5, SizeZ_mm=0.6, Supplier 1=Digi-Key, Supplier 2=Newark, Supplier 3=Mouser, Supplier Part Number 2=89M6681, Supplier Part Number 3=71-CRCW0402J-56-E3, Technology="Thick Film", Value1=5%, VDC_V=50V
R62 R63 R68 R71 R79 R80 R92 R95 R107 R117 R132 R140 R150: library part CMP-0026890-5, "RES, 2.2 k, 5%, 0.063 W, AEC-Q200 Grade 0, 0402", Manufacturer=Vishay-Dale, Power_W=63mW, Supplier Part Number 1=541-2.2KJCT-ND, TempCo="200 ppm/C", Tolerance_%=5%, Value2=0.063W, Value_Code=2k20, ValueDisplayed=2.2k, AEC Category=Q200, AEC Grade=0, AEC Qualified=Y, ComponentLink1Description="Datasheet link", ComponentLink1URL=http://www.vishay.com/docs/20035/dcrcwe3.pdf, CompType=Resistor, EIA_Code=E24, MountType=SMT, PackageReference=0402, PartNumber=CRCW04022K20JNED, Res_ohm=2.2k, RoHS=E, SizeArea_mm2=0.5, SizeX_mm=1, SizeY_mm=0.5, SizeZ_mm=0.6, Supplier 1=Digi-Key, Supplier 2=Newark, Supplier 3=Mouser, Supplier Part Number 2=59M6710, Supplier Part Number 3=71-CRCW0402J-2.2K-E3, Technology="Thick Film", Value1=5%, VDC_V=50V
R64 R93 R108 R131: library part CMP-0078669-1, "RES, 10.0 k, 1%, 0.063 W, 0402", Manufacturer="Yageo America", Power_W=63mW, Supplier Part Number 1=311-10.0KLRCT-ND, TempCo="100 ppm/C", Tolerance_%=1%, Value2=0.063W, Value_Code=10k0, ValueDisplayed=10.0k, AEC Category=Q200, AEC Grade=N/A, AEC Qualified=N, ComponentLink1Description="Datasheet link", ComponentLink1URL=http://www.yageo.com/documents/recent/PYu-RC_Group_51_RoHS_L_8.pdf, CompType=Resistor, EIA_Code=E96, Green_EU RoHS="Passed with Exemption", Green_EU RoHS-2=Passed, Green_Lifecycle=Active, Green_REACh=Passed, MountType=SMT, PackageReference=0402, PartNumber=RC0402FR-0710KL, Res_ohm=10k, RoHS=Y, SizeArea_mm2=0.5, SizeX_mm=1, SizeY_mm=0.5, SizeZ_mm=0.6, Supplier 1=Digi-Key, Supplier 2=Newark, Supplier 3=Mouser, Supplier Part Number 2=98K7499, Supplier Part Number 3=603-RC0402FR-0710KL, Technology="Thick Film", Value1=1%
R69 R70 R123 R124: library part CMP-0026863-2, "RES, 1.5 M, 5%, 0.063 W, AEC-Q200 Grade 0, 0402", Manufacturer=Vishay-Dale, Power_W=63mW, Supplier Part Number 1=541-1.5MJCT-ND, TempCo="200 ppm/C", Tolerance_%=5%, Value2=0.063W, Value_Code=1M50, ValueDisplayed=1.5M, AEC Category=Q200, AEC Grade=0, AEC Qualified=Y, ComponentLink1Description="Datasheet link", ComponentLink1URL=http://www.vishay.com/docs/20035/dcrcwe3.pdf, CompType=Resistor, EIA_Code=E24, MountType=SMT, PackageReference=0402, PartNumber=CRCW04021M50JNED, Res_ohm=1.5M, RoHS=E, SizeArea_mm2=0.5, SizeX_mm=1, SizeY_mm=0.5, SizeZ_mm=0.6, Supplier 1=Digi-Key, Supplier 2=Mouser, Supplier Part Number 2=71-CRCW04021M50JNED, Technology="Thick Film", Value1=5%, VDC_V=50V
R74 R75: library part CMP-0026949-3, "RES, 56 k, 5%, 0.063 W, AEC-Q200 Grade 0, 0402", Manufacturer=Vishay-Dale, Power_W=63mW, Supplier Part Number 1=541-56KJCT-ND, TempCo="200 ppm/C", Tolerance_%=5%, Value2=0.063W, Value_Code=56k0, ValueDisplayed=56k, AEC Category=Q200, AEC Grade=0, AEC Qualified=Y, ComponentLink1Description="Datasheet link", ComponentLink1URL=http://www.vishay.com/docs/20035/dcrcwe3.pdf, CompType=Resistor, EIA_Code=E24, MountType=SMT, PackageReference=0402, PartNumber=CRCW040256K0JNED, Res_ohm=56k, RoHS=E, SizeArea_mm2=0.5, SizeX_mm=1, SizeY_mm=0.5, SizeZ_mm=0.6, Supplier 1=Digi-Key, Supplier 2=Newark, Supplier 3=Mouser, Supplier Part Number 2=89M6680, Supplier Part Number 3=71-CRCW0402J-56K-E3, Technology="Thick Film", Value1=5%, VDC_V=50V
R77 R78 R81 R83: library part CMP-0026765-1, "RES, 10.0, 0.1%, 0.063 W, 0402", Manufacturer="TE Connectivity", Power_W=63mW, Supplier Part Number 1=A102583CT-ND, TempCo="25 ppm/C", Tolerance_%=0.1%, Value2=0.063W, Value_Code=10R0, ValueDisplayed=10.0, AEC Category=Q200, AEC Grade=N/A, AEC Qualified=N, ComponentLink1Description="Datasheet link", ComponentLink1URL=http://www.te.com/commerce/DocumentDelivery/DDEController?Action=srchrtrv&DocNm=1773200&DocType=DS&DocLang=English, CompType=Resistor, EIA_Code=E192, LatestRevisionDate=2017-03-09, MountType=SMT, PackageReference=0402, PartNumber=CPF0402B10RE1, Published=2008-06-26, Publisher="Texas Instruments", Res_ohm=10, RoHS=Y, SizeArea_mm2=0.5, SizeX_mm=1, SizeY_mm=0.5, SizeZ_mm=0.35, Supplier 1=Digi-Key, Supplier 2=Newark, Supplier 3=Mouser, Supplier Part Number 2=80P3855, Supplier Part Number 3=279-CPF0402B10RE1, Technology="Thin Film", U/M=EA, Value1=0.1%
R82 R84 R86: library part CMP-0081856-1, "RES, 0, 0%, 0.2 W, AEC-Q200 Grade 0, 0402", Manufacturer=Vishay-Dale, Power_W=200mW, Supplier Part Number 1=541-0.0YBTR-ND, Tolerance_%=0%, Value2=0.2W, Value_Code=0, AEC Category=Q200, AEC Grade=0, AEC Qualified=Y, ComponentLink1Description="Datasheet link", ComponentLink1URL=http://www.vishay.com/docs/20043/crcwhpe3.pdf, CompType=Resistor, MountType=SMT, PackageReference=0402, PartNumber=CRCW04020000Z0EDHP, Res_ohm=0, RoHS=Y, SizeArea_mm2=0.5, SizeAreaWB_mm2=3, SizeX_mm=1, SizeY_mm=0.5, SizeZ_mm=0.6, Supplier 1=Digi-Key, Supplier 2=Newark, Supplier 3=Mouser, Supplier Part Number 2=96Y9050, Supplier Part Number 3=71-CRCW04020000Z0EDH, Technology="Thick Film", Value1=0%, ValueDisplayed=0, VDC_V=50V
R87 R88 R90 R91 R98 R99 R105 R106 R119 R121 R129 R130: library part CMP-0026738-1, "RES, 49.9, 1%, 0.063 W, 0402", Manufacturer="Yageo America", Power_W=63mW, Supplier Part Number 1=311-49.9LRCT-ND, TempCo="100 ppm/C", Tolerance_%=1%, Value2=0.063W, Value_Code=49R9, ValueDisplayed=49.9, AEC Category=Q200, AEC Grade=N/A, AEC Qualified=N, ComponentLink1Description="Datasheet link", ComponentLink1URL=http://www.yageo.com/documents/recent/PYu-RC_Group_51_RoHS_L_1.pdf, CompType=Resistor, EIA_Code=E96, LatestRevisionDate=2017-03-09, MountType=SMT, PackageReference=0402, PartNumber=RC0402FR-0749R9L, Published=2008-06-26, Publisher="Texas Instruments", Res_ohm=49.9, RoHS=Y, SizeArea_mm2=0.5, SizeX_mm=1, SizeY_mm=0.5, SizeZ_mm=0.6, Supplier 1=Digi-Key, Supplier 2=Newark, Supplier 3=Mouser, Supplier Part Number 2=67R9942, Supplier Part Number 3=603-RC0402FR-0749R9L, Technology="Thick Film", U/M=EA, Value1=1%, VDC_V=50V
R89 R104 R128: library part CMP-0026413-2, "RES, 4.87 k, 1%, 0.063 W, AEC-Q200 Grade 0, 0402", Manufacturer=Vishay-Dale, Power_W=63mW, Supplier Part Number 1=541-4.87KLCT-ND, TempCo="100 ppm/C", Tolerance_%=1%, Value2=0.063W, Value_Code=4k87, ValueDisplayed=4.87k, AEC Category=Q200, AEC Grade=0, AEC Qualified=Y, ComponentLink1Description="Datasheet link", ComponentLink1URL=http://www.vishay.com/docs/20035/dcrcwe3.pdf, CompType=Resistor, EIA_Code=E96, MountType=SMT, PackageReference=0402, PartNumber=CRCW04024K87FKED, Res_ohm=4.87k, RoHS=E, SizeArea_mm2=0.5, SizeX_mm=1, SizeY_mm=0.5, SizeZ_mm=0.6, Supplier 1=Digi-Key, Supplier 2=Newark, Supplier 3=Mouser, Supplier Part Number 2=52K7047, Supplier Part Number 3=71-CRCW0402-4.87K-E3, Technology="Thick Film", Value1=1%, VDC_V=50V
R94 R110 R134: library part CMP-0026237-2, "RES, 2.49 k, 1%, 0.063 W, AEC-Q200 Grade 0, 0402", Manufacturer=Vishay-Dale, Power_W=63mW, Supplier Part Number 1=541-2.49KLCT-ND, TempCo="100 ppm/C", Tolerance_%=1%, Value2=0.063W, Value_Code=2k49, ValueDisplayed=2.49k, AEC Category=Q200, AEC Grade=0, AEC Qualified=Y, ComponentLink1Description="Datasheet link", ComponentLink1URL=http://www.vishay.com/docs/20035/dcrcwe3.pdf, CompType=Resistor, EIA_Code=E96, MountType=SMT, PackageReference=0402, PartNumber=CRCW04022K49FKED, Res_ohm=2.49k, RoHS=E, SizeArea_mm2=0.5, SizeX_mm=1, SizeY_mm=0.5, SizeZ_mm=0.6, Supplier 1=Digi-Key, Supplier 2=Newark, Supplier 3=Mouser, Supplier Part Number 2=52K6803, Supplier Part Number 3=71-CRCW0402-2.49K-E3, Technology="Thick Film", Value1=1%, VDC_V=50V
R96 R97 R109 R118 R133 R141: library part CMP-0025813-4, "RES, 470, 5%, 0.1 W, AEC-Q200 Grade 0, 0603", Manufacturer=Vishay-Dale, Power_W=100mW, Supplier Part Number 1=541-470GCT-ND, TempCo="200 ppm/C", Tolerance_%=5%, Value2=0.1W, Value_Code=470R, ValueDisplayed=470, AEC Category=Q200, AEC Grade=0, AEC Qualified=Y, ComponentLink1Description="Datasheet link", ComponentLink1URL=http://www.vishay.com/docs/20035/dcrcwe3.pdf, CompType=Resistor, EIA_Code=E24, MountType=SMT, PackageReference=0603, PartNumber=CRCW0603470RJNEA, Res_ohm=470, RoHS=E, SizeArea_mm2=1.28, SizeX_mm=1.6, SizeY_mm=0.8, SizeZ_mm=1, Supplier 1=Digi-Key, Supplier 2=Newark, Supplier 3=Mouser, Supplier Part Number 2=59M6817, Supplier Part Number 3=71-CRCW0603J-470-E3, Technology="Thick Film", Value1=5%, VDC_V=75V
R100 R101: library part CMP-0026938-5, "RES, 4.7 k, 5%, 0.063 W, AEC-Q200 Grade 0, 0402", Manufacturer=Vishay-Dale, Power_W=63mW, Supplier Part Number 1=541-4.7KJCT-ND, TempCo="200 ppm/C", Tolerance_%=5%, Value2=0.063W, Value_Code=4k70, ValueDisplayed=4.7k, AEC Category=Q200, AEC Grade=0, AEC Qualified=Y, ComponentLink1Description="Datasheet link", ComponentLink1URL=http://www.vishay.com/docs/20035/dcrcwe3.pdf, CompType=Resistor, EIA_Code=E24, MountType=SMT, PackageReference=0402, PartNumber=CRCW04024K70JNED, Res_ohm=4.7k, RoHS=E, SizeArea_mm2=0.5, SizeX_mm=1, SizeY_mm=0.5, SizeZ_mm=0.6, Supplier 1=Digi-Key, Supplier 2=Newark, Supplier 3=Mouser, Supplier Part Number 2=59M6733, Supplier Part Number 3=71-CRCW0402J-4.7K-E3, Technology="Thick Film", Value1=5%, VDC_V=50V
R102 R103 R111 R112 R113 R114 R115 R116 R125 R126 R127 R135 R136 R137 R138 R139: library part CMP-0027010-2, "RES, 2.2 k, 5%, 0.05 W, 0201", Manufacturer=Vishay-Dale, Power_W=50mW, Supplier Part Number 1=541-2.2KAGCT-ND, TempCo="200 ppm/C", Tolerance_%=5%, Value2=0.05W, Value_Code=2k20, ValueDisplayed=2.2k, AEC Category=Q200, AEC Grade=N/A, AEC Qualified=N, ComponentLink1Description="Datasheet link", ComponentLink1URL=http://www.vishay.com/docs/20052/crcw0201e3.pdf, CompType=Resistor, EIA_Code=E24, MountType=SMT, PackageReference=0201, PartNumber=CRCW02012K20JNED, Res_ohm=2.2k, RoHS=E, SizeArea_mm2=0.18, SizeX_mm=0.6, SizeY_mm=0.3, SizeZ_mm=0.26, Supplier 1=Digi-Key, Supplier 2=Newark, Supplier 3=Mouser, Supplier Part Number 2=48P7324, Supplier Part Number 3=71-CRCW02012K20JNED, Technology="Thick Film", Value1=5%, VDC_V=30V
R120: library part CMP-0026081-3, "RES, 1.27 k, 1%, 0.063 W, AEC-Q200 Grade 0, 0402", Manufacturer=Vishay-Dale, Power_W=63mW, Supplier Part Number 1=541-1.27KLCT-ND, TempCo="100 ppm/C", Tolerance_%=1%, Value2=0.063W, Value_Code=1k27, ValueDisplayed=1.27k, AEC Category=Q200, AEC Grade=0, AEC Qualified=Y, ComponentLink1Description="Datasheet link", ComponentLink1URL=http://www.vishay.com/docs/20035/dcrcwe3.pdf, CompType=Resistor, EIA_Code=E96, MountType=SMT, PackageReference=0402, PartNumber=CRCW04021K27FKED, Res_ohm=1.27k, RoHS=E, SizeArea_mm2=0.5, SizeX_mm=1, SizeY_mm=0.5, SizeZ_mm=0.6, Supplier 1=Digi-Key, Supplier 2=Newark, Supplier 3=Mouser, Supplier Part Number 2=52K6562, Supplier Part Number 3=71-CRCW0402-1.27K-E3, Technology="Thick Film", Value1=1%, VDC_V=50V
R143 R145 R149 R156: library part CMP-0026825-5, "RES, 10 k, 5%, 0.063 W, AEC-Q200 Grade 0, 0402", Manufacturer=Vishay-Dale, Power_W=63mW, Supplier Part Number 1=541-10KJCT-ND, TempCo="200 ppm/C", Tolerance_%=5%, Value2=0.063W, Value_Code=10k0, ValueDisplayed=10k, AEC Category=Q200, AEC Grade=0, AEC Qualified=Y, ComponentLink1Description="Datasheet link", ComponentLink1URL=http://www.vishay.com/docs/20035/dcrcwe3.pdf, CompType=Resistor, EIA_Code=E24, MountType=SMT, PackageReference=0402, PartNumber=CRCW040210K0JNED, Res_ohm=10k, RoHS=E, SizeArea_mm2=0.5, SizeX_mm=1, SizeY_mm=0.5, SizeZ_mm=0.6, Supplier 1=Digi-Key, Supplier 2=Newark, Supplier 3=Mouser, Supplier Part Number 2=59M6696, Supplier Part Number 3=71-CRCW0402J-10K-E3, Technology="Thick Film", Value1=5%, VDC_V=50V
R144 R152 R153 R155: library part CMP-0026822-3, "RES, 0, 5%, 0.063 W, AEC-Q200 Grade 0, 0402", Manufacturer=Vishay-Dale, Power_W=63mW, Supplier Part Number 1=541-0.0JCT-ND, TempCo="200 ppm/C", Tolerance_%=5%, Value2=0.063W, Value_Code=0000, ValueDisplayed=0, AEC Category=Q200, AEC Grade=0, AEC Qualified=Y, ComponentLink1Description="Datasheet link", ComponentLink1URL=http://www.vishay.com/docs/20035/dcrcwe3.pdf, CompType=Resistor, EIA_Code=E24, MountType=SMT, PackageReference=0402, PartNumber=CRCW04020000Z0ED, Res_ohm=0, RoHS=E, SizeArea_mm2=0.5, SizeX_mm=1, SizeY_mm=0.5, SizeZ_mm=0.6, Supplier 1=Digi-Key, Supplier 2=Newark, Supplier 3=Mouser, Supplier Part Number 2=52K6543, Supplier Part Number 3=71-CRCW0402-0-E3, Technology="Thick Film", Value1=5%, VDC_V=50V
R146 R147 R148 R151: library part CMP-0026852-3, "RES, 1.0 k, 5%, 0.063 W, AEC-Q200 Grade 0, 0402", Manufacturer=Vishay-Dale, Power_W=63mW, Supplier Part Number 1=541-1.0KJCT-ND, TempCo="200 ppm/C", Tolerance_%=5%, Value2=0.063W, Value_Code=1k00, ValueDisplayed=1.0k, AEC Category=Q200, AEC Grade=0, AEC Qualified=Y, ComponentLink1Description="Datasheet link", ComponentLink1URL=http://www.vishay.com/docs/20035/dcrcwe3.pdf, CompType=Resistor, EIA_Code=E24, MountType=SMT, PackageReference=0402, PartNumber=CRCW04021K00JNED, Res_ohm=1k, RoHS=E, SizeArea_mm2=0.5, SizeX_mm=1, SizeY_mm=0.5, SizeZ_mm=0.6, Supplier 1=Digi-Key, Supplier 2=Newark, Supplier 3=Mouser, Supplier Part Number 2=59M6691, Supplier Part Number 3=71-CRCW0402J-1.0K-E3, Technology="Thick Film", Value1=5%, VDC_V=50V